# Altium PCB PCB1.PcbDoc
Units mil, origin at the board's own origin, x right, y up, seen from the top; angles counter-clockwise.
Board outline 680 x 990 mil, 2 copper layers (Top Layer, Bottom Layer); 21 components, 12 nets, 59 pads, 12 vias.
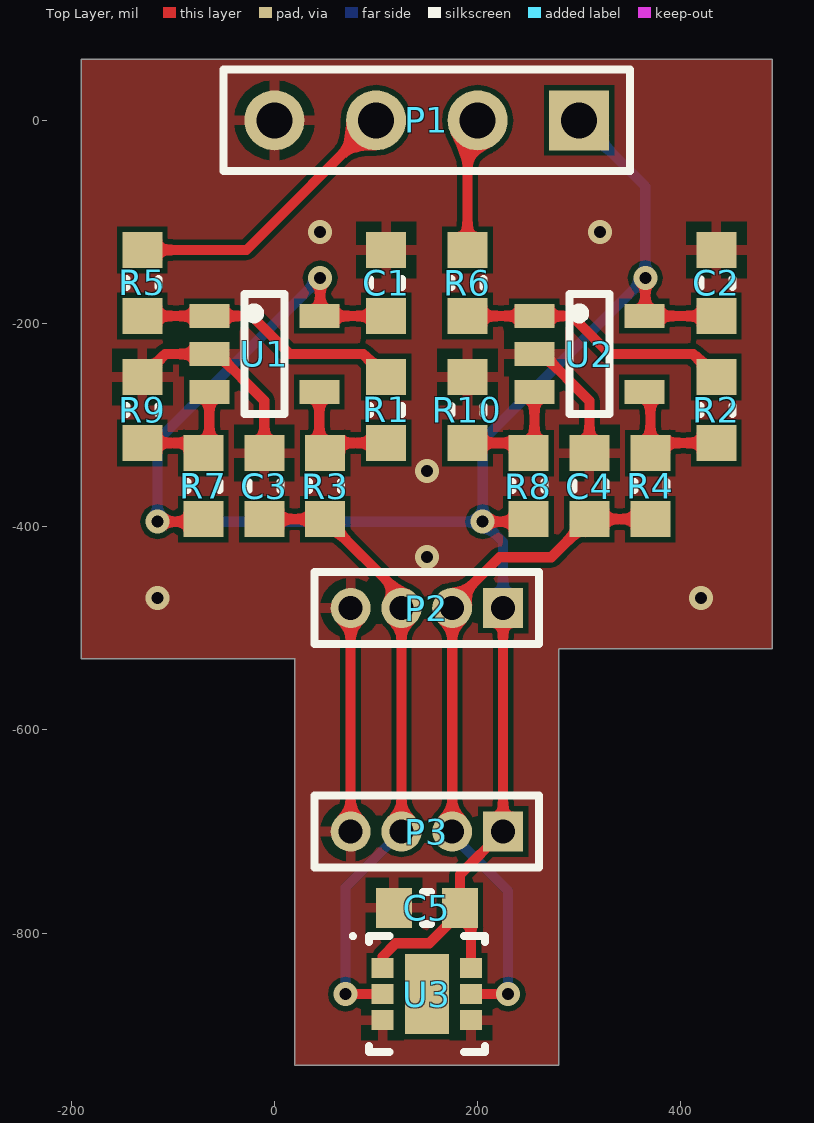
[diagram p0: Top Layer view]
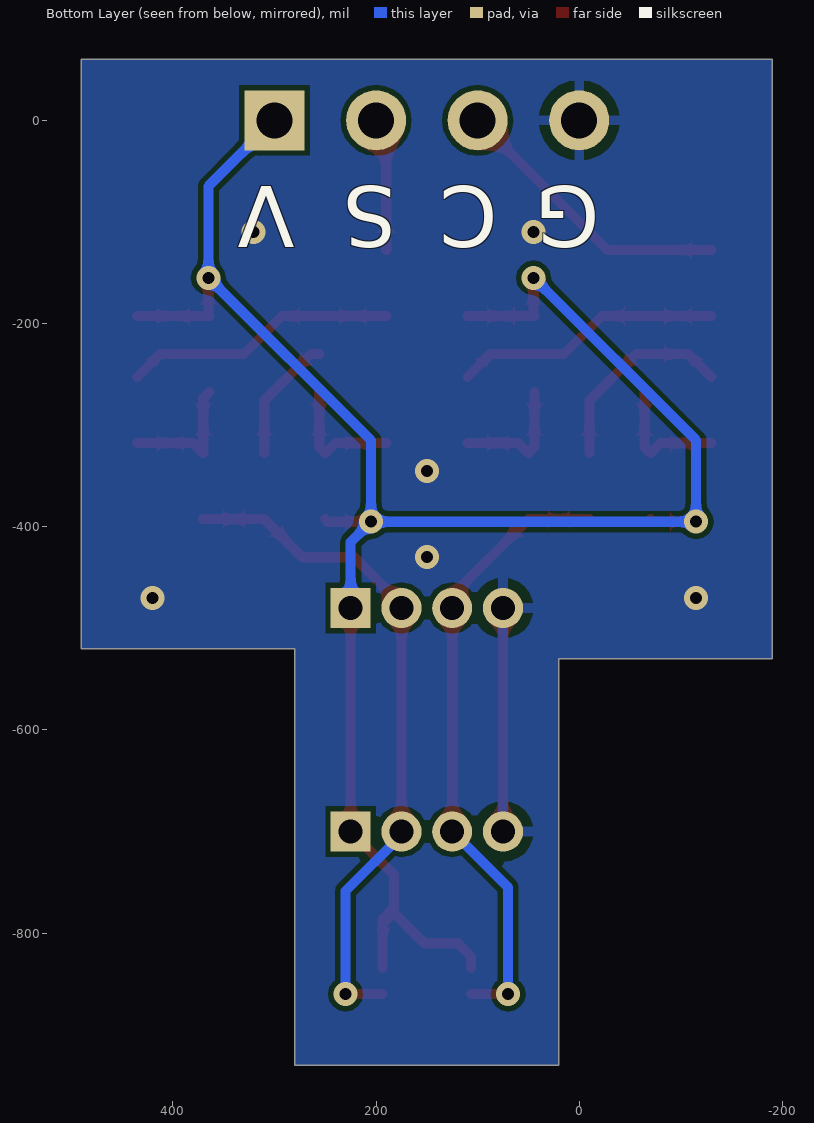
[diagram p1: Bottom Layer view, seen from below]

## Layer stack, top to bottom
Top Solder: solder mask 0.4, Solder Resist, Dk 3.5
Top Layer: signal copper 1.4
Dielectric 1: dielectric 12.6, FR-4, Dk 4.8
Bottom Layer: signal copper 1.4
Bottom Solder: solder mask 0.4, Solder Resist, Dk 3.5

## Board outline
-190,-530 20,-530 20,-930 280,-930 280,-520 490,-520 490,60 -190,60

## Design rules (kind name [scope] priority, off if disabled: settings)
Clearance [All] p1: gap=5 ignorepadtopadclearanceinfootprint=FALSE
PolygonConnect [All] p1: thpad.connectstyle=Relief thpad.reliefconductorwidth=10 thpad.reliefentries=4 thpad.polygonreliefangle="90 Angle" thpad.airgapwidth=10 smdpad.connectstyle=Relief smdpad.reliefconductorwidth=10 smdpad.reliefentries=4 smdpad.polygonreliefangle="90 Angle" smdpad.airgapwidth=10 via.connectstyle=Direct via.reliefconductorwidth=10 via.reliefentries=4 via.polygonreliefangle="90 Angle" via.airgapwidth=10
RoutingVias [All] p1: holewidth=11.81 width=23.62 viastyle="Through Hole" minholewidth=11.81 minwidth=23.62 maxholewidth=28 maxwidth=50
SolderMaskExpansion [All] p1: expansion=4
Width [All] p1: maxlimit=10 minlimit=10 preferedwidth=10
30 further rules are at their usual default settings.

## Components (designator, comment, footprint, x,y, rotation, side; value= is the part's Value field where it differs from the comment)
C1 "100nF" 0603 110,-160 r90 top
C2 "100nF" 0603 435,-160 r90 top
C3 "10pF" 0603 -10,-360 r270 top
C4 "10pF" 0603 310,-360 r270 top
C5 "Cap" 0603 150,-775 r180 top
P1 "Header 4" HDR1X4 300,0 r180 top
P2 "MHDR1X4" MHDR1X4 225,-480 r180 top
P3 "MHDR1X4" MHDR1X4 225,-700 r180 top
R1 "301k" 0603 110,-285 r90 top
R2 "301k" 0603 435,-285 r90 top
R3 "100k" 0603 50,-360 r90 top
R4 "100k" 0603 370,-360 r90 top
R5 "10k" 0603 -130,-160 r90 top
R6 "10k" 0603 190,-160 r90 top
R7 "162k" 0603 -70,-360 r90 top
R8 "162k" 0603 250,-360 r90 top
R9 "140k" 0603 -130,-285 r270 top
R10 "140k" 0603 190,-285 r270 top
U1 "AD8601" SOT23-5 -10,-230 r0 top
U2 "AD8601" SOT23-5 310,-230 r0 top
U3 "AAT003" PSON65P250X80_HS-7M 150,-860 r0 top

## Footprints (in the part's own frame and the unit in brackets; to place one, negate y for a bottom-side part, rotate by r counter-clockwise, add the part's x,y. Pads: shape width x height; smd on the part's side, far side on the other; paste and mask are expansions set on the pad)
0603 [mm]
  rect 0.9x1 smd: 1(-0.825,0) 2(0.825,0)
  silkscreen extent -0.1,-0.4 0.1,0.4
HDR1X4 [mm] "Connector; Header; 4 Position"
  rect 1.5x1.5 hole 0.9: 1(0,0)
  round 1.5 hole 0.9: 2(2.54,0) 3(5.08,0) 4(7.62,0)
  silkscreen extent -1.27,-1.27 8.89,1.27
MHDR1X4 [mm] "Connector; Header; 4 Position"
  rect 1x1 hole 0.6: 1(0,0)
  round 1 hole 0.6: 2(1.27,0) 3(2.54,0) 4(3.81,0)
  silkscreen extent -0.9,-0.9 4.71,0.9
PSON65P250X80_HS-7M [mm] "PSON, 6-Leads, Body 2.50x2.50mm, Pitch 0.65mm, Thermal Pad 2.00x1.10mm, IPC Low Density"
  rect 0.55x0.5 smd: 1(-1.105,0.65) 2(-1.105,0) 3(-1.105,-0.65) 4(1.105,-0.65) 5(1.105,0) 6(1.105,0.65)
  rect 1.1x2 smd: 7(0,0)
  silkscreen extent -1.9,-1.45 1.45,1.5, body extent -1.3,-1.3 1.3,1.3, height 0.8
SOT23-5 [mm] "SOT23, 5-Leads, Body 2.90x2.80mm, Pitch 0.95mm, IPC Medium Density"
  rect 1x0.6 smd: 1(-1.375,0.95) 2(-1.375,0) 3(-1.375,-0.95) 4(1.375,-0.95) 5(1.375,0.95)
  silkscreen extent -0.5,-1.5 0.5,1.5

## Part data
C1 C2 C3 C4: library part Cap
P1 P2 P3: "Header, 4-Pin", LatestRevisionDate=17-Jul-2002, LatestRevisionNote="Re-released for DXP Platform.", Publisher="Altium Limited"
R1 R2 R3 R4 R5 R6 R7 R8 R9 R10: library part Res

## Via types
v1: diameter 23.62, hole 11.81, Top Layer to Bottom Layer, tented both sides, 12 vias

## Nets (pads, with @x,y where several pads share a name; then routed paths per layer and width w, separated by ;. In a path a pad name is that pad's centre, name@x,y a point inside that pad or via, vN(x,y) a via of type N, cw(c..) or ccw(c..) an arc to the next point about the centre after c; other vN are vias at no path point)
COS: C3.2 P2.3 P3.3 R3.1 U3.2 | length 617.9
  Top Layer w10: C3.2 R3.1 125,-467.48 P2.3 P3.3 ; v1(70,-860) U3.2
  Bottom Layer w10: v1(70,-860) 70,-755 P3.3
GND: C1.2 C2.2 C3.1 C4.1 C5.2 P1.4 P2.4 P3.4 R9.1 R10.1 U1.2 U2.2 U3.3 U3.4 | length 544.7
  Top Layer w10: R9.1 -107.48,-230 U1.2 -55.9,-230 -10,-275.9 C3.1 ; P3.4 P2.4 ; U2.2 264.1,-230 310,-275.9 C4.1
  other v1: -115,-470 420,-470 150,-430 150,-345 45,-110 320.41,-110
NetR1_1: R1.1 R3.2 U1.4 | length 126.7
  Top Layer w10: U1.4 44.13,-321.65 R3.2 60.04,-317.48 R1.1
NetR1_2: R1.2 R5.1 U1.1 | length 264.9
  Top Layer w10: R5.1 -129.88,-192.6 U1.1 -22.4,-192.6 15,-230 87.48,-230 R1.2
NetR2_1: R2.1 R4.2 U2.4 | length 131.7
  Top Layer w10: U2.4 370,-273.27 R4.2 380.04,-317.48 R2.1
NetR2_2: R2.2 R6.1 U2.1 | length 269.9
  Top Layer w10: R6.1 190.12,-192.6 U2.1 292.6,-192.6 330,-230 412.48,-230 R2.2
NetR7_2: R7.2 R9.2 U1.3 | length 126.7
  Top Layer w10: R9.2 -80.04,-317.48 R7.2 -64.13,-321.65 U1.3
NetR8_2: R8.2 R10.2 U2.3 | length 126.7
  Top Layer w10: R10.2 239.96,-317.48 R8.2 255.87,-321.65 U2.3
OCOS: P1.3 R5.2 | length 282.8
  Top Layer w10: R5.2 -27.52,-127.52 P1.3
OSIN: P1.2 R6.2 | length 131.7
  Top Layer w10: R6.2 190,-10 P1.2
SIN: C4.2 P2.2 P3.2 R4.1 U3.5 | length 672.6
  Top Layer w10: P3.2 P2.2 175,-476.49 221.49,-430 272.48,-430 C4.2 R4.1 ; U3.5 v1(230,-860)
  Bottom Layer w10: P3.2 175,-703.51 230,-758.51 v1(230,-860)
VCC: C1.1 C2.1 C5.1 P1.1 P2.1 P3.1 R7.1 R8.1 U1.5 U2.5 U3.1 U3.6 | length 2010
  Top Layer w10: v1(-115,-395) -72.52,-395 R7.1 ; v1(45,-155) 45,-191.73 U1.5 109.88,-192.6 C1.1 ; U3.1 106.5,-822.95 119.45,-810 152.48,-810 182.48,-780 C5.1@193.5,-791.02 ; U3.6 C5.1@193.5,-791.02 ; v1(205,-395) 247.48,-395 R8.1 ; P2.1 P3.1 182.48,-742.52 C5.1 193.5,-786.02 C5.1@193.5,-791.02 ; v1(365,-155) 365,-191.73 U2.5 434.88,-192.6 C2.1
  Bottom Layer w10: v1(45,-155) -115,-315 v1(-115,-395) v1(205,-395) ; P2.1 225,-415 v1(205,-395) ; P1.1 365,-65 v1(365,-155) 205,-315 v1(205,-395)
pads on no net: U3.7

## Polygon pours and split planes (outlines as drawn)
GND on Top Layer "Top Layer-GND" (solid, pour order 4): 20,-930 280,-930 280,-520 490,-520 490,60 -190,60 -190,-530 20,-530
GND on Bottom Layer "Bottom Layer-GND" (solid, pour order 8): 20,-930 280,-930 280,-520 490,-520 490,60 -190,60 -190,-530 20,-530

## Silkscreen, mask and mechanical layers (free items; w line width, h text height)
Bottom Overlay:
  text "G" at -20,-65 h60 r180
  text "C" at 80,-65 h60 r180
  text "S" at 180,-65 h60 r180
  text "V" at 280,-65 h60 r180
Mechanical 1:
  the board outline again, w10